# EAGLE board RoboArm Board (EAGLE 9.6.2)
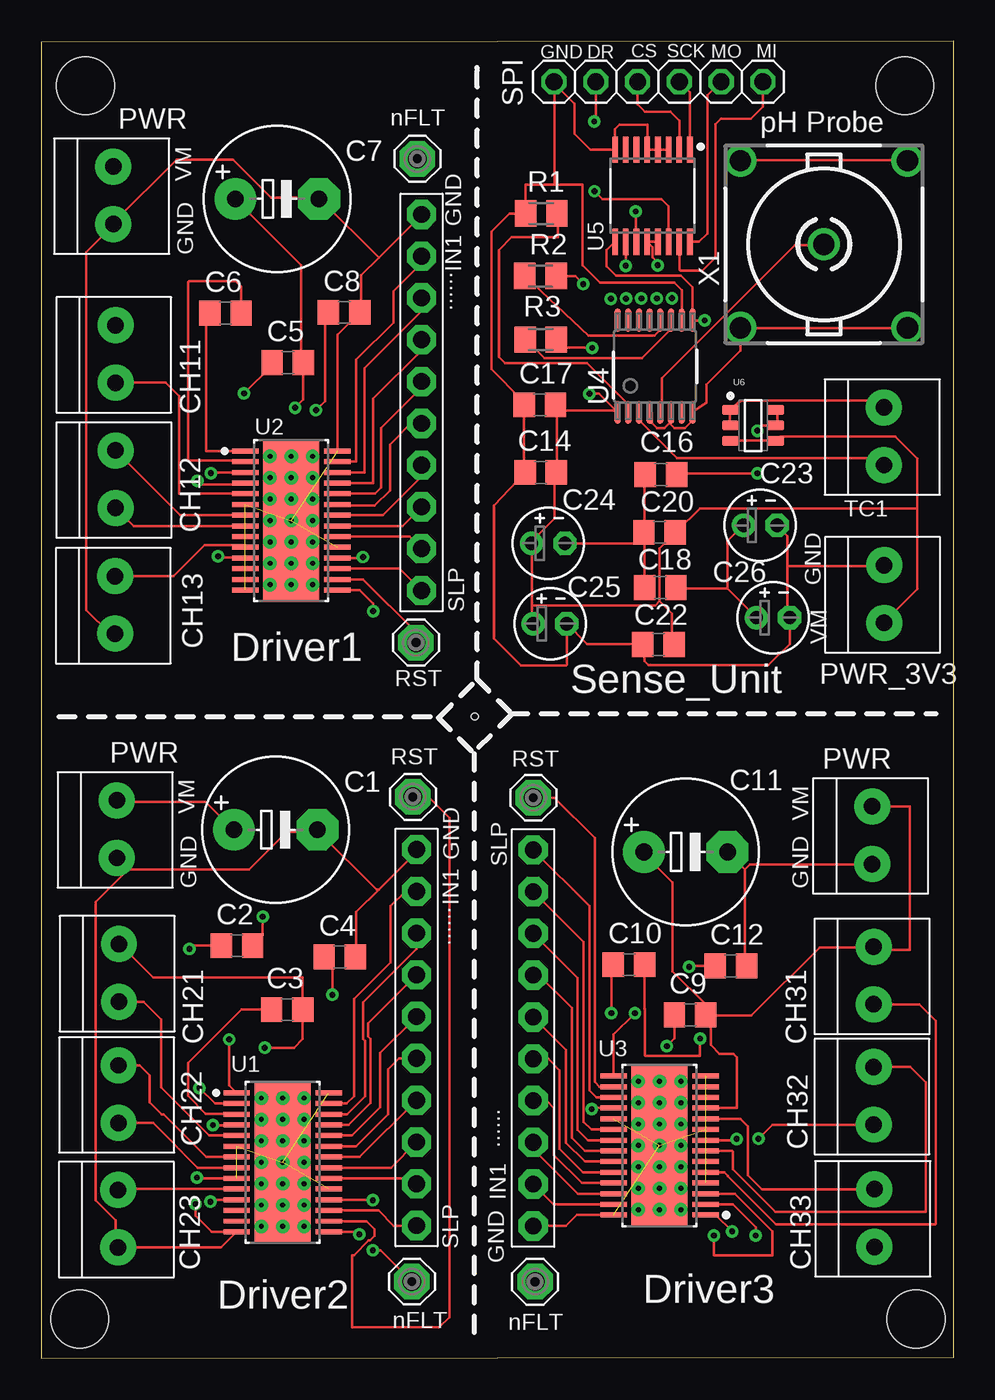
[diagram p0: board, top side]
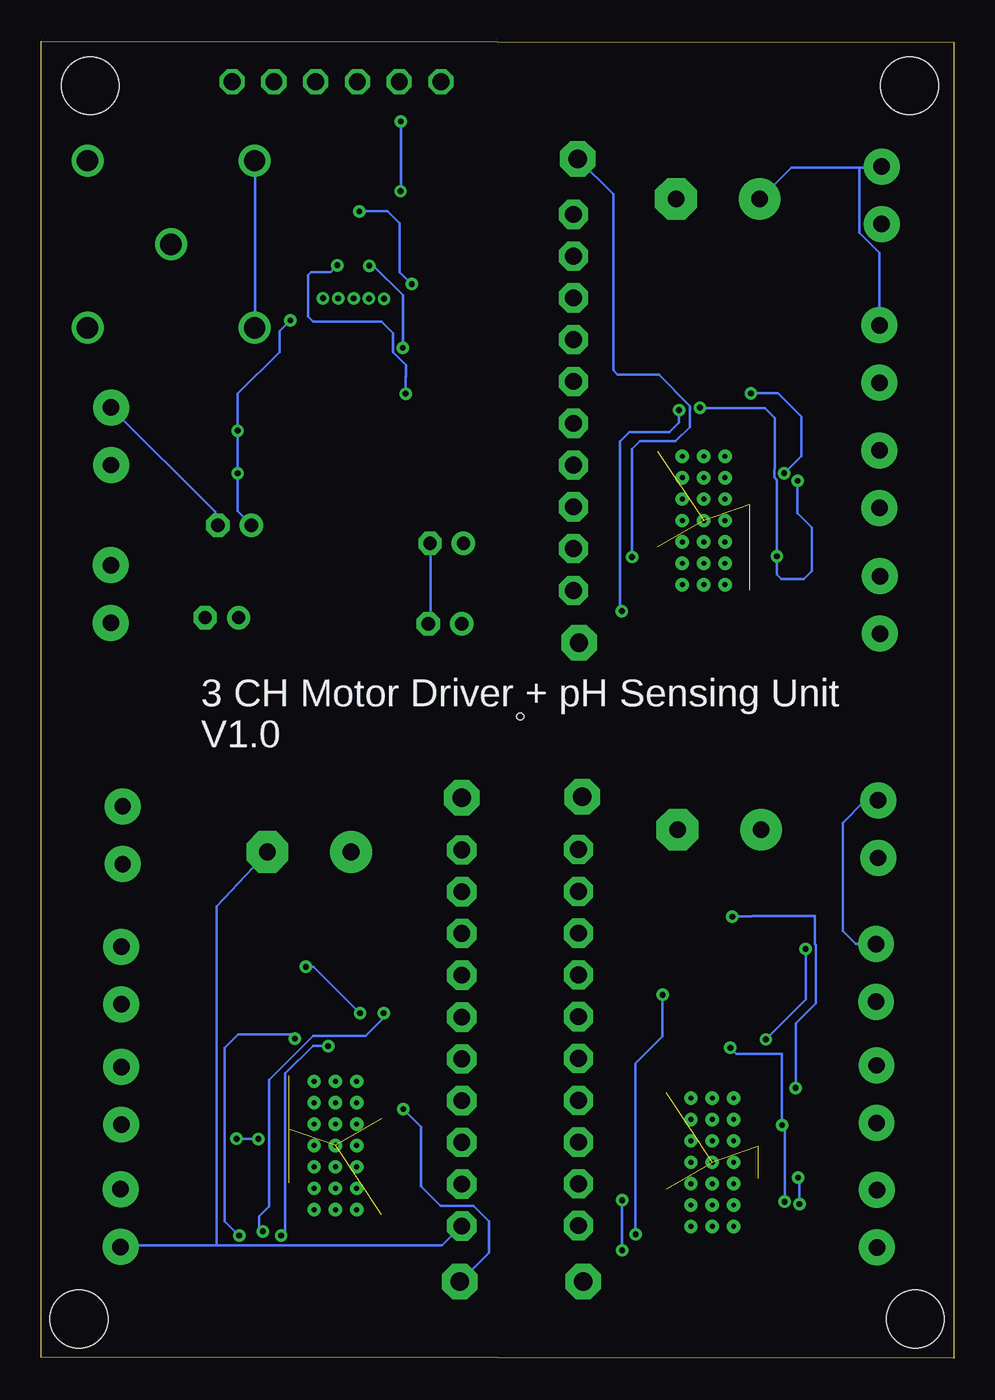
[diagram p1: board, bottom side, seen from below]

Size 55.49 x 80.07 mm. Coordinates in mm from the lower left corner, seen from the top.
Outline: 0,0 55.49,0.07 55.49,80.07 0,80 0,0
Copper layers (1*16): Top 0.035mm / dielectric 1.5mm / Bottom 0.035mm
Design rules "default": minimum track width 6mil, minimum drill 0.35mm, track to track 6mil, track to pad 6mil, pad to pad 6mil, via to via 6mil, smd to smd 6mil, copper to edge 40mil, drill to drill 6mil, minimum pad ring 10mil, minimum via ring 8mil, stop-mask expansion 4mil, vias tented up to drill 0mil, thermal gap 10mil
Holes 3.5 mm at 52.51,77.36 2.69,77.36 53.19,2.39 2.35,2.39
Holes 0.4 mm at 26.36,39.01

## Footprints (pad centres in the part's own frame; a part is rotated, then mirrored left to right if it is on the bottom)
E5-8,5 = drill 1.016 pad 2.54: + -2.54,0 | drill 1.016 pad 2.54 octagon: - 2.54,0
C0805 = smd 1.3 x 1.5: 1 -0.95,0; 2 0.95,0
E2-4 = drill 0.813 pad 1.422: + -1.016,0 | drill 0.813 pad 1.422 octagon: - 1.016,0
1X2-3.5MM = drill 1 pad 2.184: 1 1.8,0; 2 -1.7,0
1X06 = drill 1.016 octagon: 1 -6.35,0; 2 -3.81,0; 3 -1.27,0; 4 1.27,0; 5 3.81,0; 6 6.35,0
SE11 = drill 1.118 pad 2.159 octagon: MP 0,0
M0805 = smd 1.3 x 1.6: 1 -0.95,0; 2 0.95,0
TEXAS_INSTRUMENTS_DRV8844PWP_0 = smd 1.6 x 0.3: 1 -2.8,4.225; 2 -2.8,3.575; 3 -2.8,2.925; 4 -2.8,2.275; 5 -2.8,1.625; 6 -2.8,0.975; 7 -2.8,0.325; 8 -2.8,-0.325; 9 -2.8,-0.975; 10 -2.8,-1.625; 11 -2.8,-2.275; 12 -2.8,-2.925; 13 -2.8,-3.575; 14 -2.8,-4.225; 15 2.8,-4.225; 16 2.8,-3.575; 17 2.8,-2.925; 18 2.8,-2.275; 19 2.8,-1.625; 20 2.8,-0.975; 21 2.8,-0.325; 22 2.8,0.325; 23 2.8,0.975; 24 2.8,1.625; 25 2.8,2.275; 26 2.8,2.925; 27 2.8,3.575; 28 2.8,4.225 | drill 0.3 pad 0.6: PAD_1 -1.3,3.9; PAD_2 -1.3,2.6; PAD_3 -1.3,1.3; PAD_4 -1.3,0; PAD_5 -1.3,-1.3; PAD_6 -1.3,-2.6; PAD_7 -1.3,-3.9; PAD_8 0,3.9; PAD_9 0,2.6; PAD_10 0,1.3; PAD_11 0,0; PAD_12 0,-1.3; PAD_13 0,-2.6; PAD_14 0,-3.9; PAD_15 1.3,3.9; PAD_16 1.3,2.6; PAD_17 1.3,1.3; PAD_18 1.3,0; PAD_19 1.3,-1.3; PAD_20 1.3,-2.6; PAD_21 1.3,-3.9 | smd 3.4 x 9.7: PPAD 0,0 | smd 3.1 x 5.18: SMD_2 0,0 | smd 1.55 x 0.25: SMD_31 -2.8,4.225; SMD_32 -2.8,3.575; SMD_33 -2.8,2.925; SMD_34 -2.8,2.275; SMD_35 -2.8,1.625; SMD_36 -2.8,0.975; SMD_37 -2.8,0.325; SMD_38 -2.8,-0.325; SMD_39 -2.8,-0.975; SMD_40 -2.8,-1.625; SMD_41 -2.8,-2.275; SMD_42 -2.8,-2.925; SMD_43 -2.8,-3.575; SMD_44 -2.8,-4.225; SMD_45 2.8,-4.225; SMD_46 2.8,-3.575; SMD_47 2.8,-2.925; SMD_48 2.8,-2.275; SMD_49 2.8,-1.625; SMD_50 2.8,-0.975; SMD_51 2.8,-0.325; SMD_52 2.8,0.325; SMD_53 2.8,0.975; SMD_54 2.8,1.625; SMD_55 2.8,2.275; SMD_56 2.8,2.925; SMD_57 2.8,3.575; SMD_58 2.8,4.225
PW0016A_L = smd 1.4 x 0.35: 1 -2.8,2.275; 2 -2.8,1.625; 3 -2.8,0.975; 4 -2.8,0.325; 5 -2.8,-0.325; 6 -2.8,-0.975; 7 -2.8,-1.625; 8 -2.8,-2.275; 9 2.8,-2.275; 10 2.8,-1.625; 11 2.8,-0.975; 12 2.8,-0.325; 13 2.8,0.325; 14 2.8,0.975; 15 2.8,1.625; 16 2.8,2.275
TEXAS_INSTRUMENTS_ADS1120IPWR_0 = smd 0.35 x 1.6: 1 -2.275,-2.8; 2 -1.625,-2.8; 3 -0.975,-2.8; 4 -0.325,-2.8; 5 0.325,-2.8; 6 0.975,-2.8; 7 1.625,-2.8; 8 2.275,-2.8; 9 2.275,2.8; 10 1.625,2.8; 11 0.975,2.8; 12 0.325,2.8; 13 -0.325,2.8; 14 -0.975,2.8; 15 -1.625,2.8; 16 -2.275,2.8 | smd 0.3 x 1.55: SMD_17 -2.275,-2.8; SMD_18 -1.625,-2.8; SMD_19 -0.975,-2.8; SMD_20 -0.325,-2.8; SMD_21 0.325,-2.8; SMD_22 0.975,-2.8; SMD_23 1.625,-2.8; SMD_24 2.275,-2.8; SMD_25 2.275,2.8; SMD_26 1.625,2.8; SMD_27 0.975,2.8; SMD_28 0.325,2.8; SMD_29 -0.325,2.8; SMD_30 -0.975,2.8; SMD_31 -1.625,2.8; SMD_32 -2.275,2.8
TEXAS_INSTRUMENTS_REF3220AIDBVR_1 = smd 1 x 0.6: 1 -1.375,0.95; 2 -1.375,0; 3 -1.375,-0.95; 4 1.375,-0.95; 5 1.375,0; 6 1.375,0.95
1X10-BIG = drill 1.016 pad 1.778 octagon: 1 -11.43,0; 2 -8.89,0; 3 -6.35,0; 4 -3.81,0; 5 -1.27,0; 6 1.27,0; 7 3.81,0; 8 6.35,0; 9 8.89,0; 10 11.43,0
R141426 = drill 1.295: 1 0,0; 2 5.08,5.08; 3 -5.08,5.08; 4 -5.08,-5.08; 5 5.08,-5.08

## Placement (x,y rotation side)
C1  100uF  [E5-8,5]  14.26,32.13 0 top
C2  0.01uF  [C0805]  11.91,25.09 0 top
C3  0.1uF  [C0805]  14.96,21.2 0 top
C4  0.47uF  [C0805]  18.15,24.4 0 top
C5  0.1uF  [C0805]  14.99,60.53 0 top
C6  0.01uF  [C0805]  11.21,63.53 0 top
C7  100uF  [E5-8,5]  14.35,70.48 0 top
C8  0.47uF  [C0805]  18.42,63.58 0 top
C9  0.1uF  [C0805]  39.45,20.88 0 top
C10  0.01uF  [C0805]  35.74,23.94 0 top
C11  100uF  [E5-8,5]  39.19,30.78 0 top
C12  0.47uF  [C0805]  41.93,23.86 0 top
C14  0.1uF  [C0805]  30.37,53.85 0 top
C16  0.1uF  [C0805]  37.68,53.72 0 top
C17  0.47uF  [C0805]  30.32,57.96 0 top
C18  0.1uF  [C0805]  37.64,46.86 0 top
C20  0.1uF  [C0805]  37.6,50.22 0 top
C22  0.1uF  [C0805]  37.53,43.39 0 top
C23  10uF  [E2-4]  43.72,50.63 0 top
C24  10uF  [E2-4]  30.83,49.55 0 top
C25  10uF  [E2-4]  30.94,44.66 0 top
C26  10uF  [E2-4]  44.5,45.03 0 top
J1  1X2-3.5MM  [1X2-3.5MM]  4.6,32.22 270 top
J2  1X2-3.5MM  [1X2-3.5MM]  4.73,23.48 270 top
J3  1X2-3.5MM  [1X2-3.5MM]  4.7,16.11 270 top
J4  1X2-3.5MM  [1X2-3.5MM]  4.68,8.54 270 top
J5  1X2-3.5MM  [1X2-3.5MM]  4.39,70.75 270 top
J6  1X2-3.5MM  [1X2-3.5MM]  4.52,61.1 270 top
J7  1X2-3.5MM  [1X2-3.5MM]  4.53,53.49 270 top
J8  1X2-3.5MM  [1X2-3.5MM]  4.49,45.85 270 top
J9  1X2-3.5MM  [1X2-3.5MM]  50.53,31.85 270 top
J10  1X2-3.5MM  [1X2-3.5MM]  50.62,23.32 270 top
J11  1X2-3.5MM  [1X2-3.5MM]  50.61,16.01 270 top
J12  1X2-3.5MM  [1X2-3.5MM]  50.66,8.58 270 top
J13  1X2-3.5MM  [1X2-3.5MM]  51.24,56.1 270 top
J15  1X2-3.5MM  [1X2-3.5MM]  51.25,46.51 270 top
JP1  [1X06]  37.53,77.6 180 top
LSP1  SE11  [SE11]  22.6,34.13 0 top
LSP2  SE11  [SE11]  22.54,4.67 0 top
LSP3  SE11  [SE11]  22.79,43.51 0 top
LSP4  SE11  [SE11]  22.87,72.92 0 top
LSP5  SE11  [SE11]  29.92,34.08 0 top
LSP6  SE11  [SE11]  30.03,4.66 0 top
R1  100  [M0805]  30.41,69.59 0 top
R2  1K  [M0805]  30.36,65.79 0 top
R3  1K  [M0805]  30.37,61.93 0 top
U1  TEXAS_INSTRUMENTS_DRV8844PWPTEXAS_INSTRUMENTS_DRV8844PWP_0_0  [TEXAS_INSTRUMENTS_DRV8844PWP_0]  14.69,11.92 0 top
U2  TEXAS_INSTRUMENTS_DRV8844PWPTEXAS_INSTRUMENTS_DRV8844PWP_0_0  [TEXAS_INSTRUMENTS_DRV8844PWP_0]  15.21,50.93 0 top
U3  TEXAS_INSTRUMENTS_DRV8844PWPTEXAS_INSTRUMENTS_DRV8844PWP_0_0  [TEXAS_INSTRUMENTS_DRV8844PWP_0]  37.6,12.94 180 top
U4  Value  [PW0016A_L]  37.32,60.31 90 top
U5  TEXAS_INSTRUMENTS_ADS1120IPWRTEXAS_INSTRUMENTS_ADS1120IPWR_0_0  [TEXAS_INSTRUMENTS_ADS1120IPWR_0]  37.17,70.67 180 top
U6  TEXAS_INSTRUMENTS_REF3220AIDBVRTEXAS_INSTRUMENTS_REF3220AIDBVR_0_1  [TEXAS_INSTRUMENTS_REF3220AIDBVR_1]  43.28,56.71 0 top
U$1  PINHD-1X10  [1X10-BIG]  22.82,19.5 270 top
U$2  PINHD-1X10  [1X10-BIG]  23.13,58.11 270 top
U$3  PINHD-1X10  [1X10-BIG]  29.91,19.48 90 top
X1  R141426  [R141426]  47.59,67.72 90 top

## Library data of the parts
C1 C7 C11 C23-C26 J1-J13 J15 JP1 U$1-U$3 = adafruit
C2-C6 C8-C10 C12 C14 C16-C18 C20 C22 = rcl; SPICEPREFIX: C
LSP1-LSP6 = solpad
R1-R3 = rcl; SPICEPREFIX: R
U1-U3 = Texas Instruments - DRV8844PWP; AMBIENT_TEMPERATURE_RANGE_HIGH: +125°C; AMBIENT_TEMPERATURE_RANGE_LOW: -40°C; CENTROID_NOT_SPECIFIED: No; DATASHEET: http://www.ti.com/lit/ds/symlink/drv8844.pdf; DEVICE_CLASS_L1: Integrated Circuits (ICs); DEVICE_CLASS_L2: Power Management ICs; DEVICE_CLASS_L3: Motor Drivers; DIGIKEY_DESCRIPTION: IC MOTOR DRIVER PAR 28HTSSOP; DIGIKEY_PART_NUMBER: 296-46510-5-ND; HEIGHT: 1.2mm; LEAD_FREE: yes; MAX_JUNCTION_TEMP: +150°C; MAX_SUPPLY_VOLTAGE: 60V; MF: Texas Instruments; MFG_PACKAGE_IDENT: PWP0028C; MFG_PACKAGE_IDENT_DATE: 0; MFG_PACKAGE_IDENT_REV: 0; MIN_SUPPLY_VOLTAGE: 8V; MOTOR_TYPE: Stepper; MOUSER_DESCRIPTION: Motor / Motion / Ignition Controllers & Drivers Brushed DC motor Solenoid/Relay Drvr; MOUSER_PART_NUMBER: 595-DRV8844PWP; MPN: DRV8844PWP; NOMINAL_SUPPLY_CURRENT: 1mA; NUMBER_OF_OUTPUTS: 4; PACKAGE: HTSSOP28; PREFIX: U; ROHS: yes; STANDOFF_HEIGHT: 0.05mm; TEMPERATURE_RANGE_HIGH: +85°C; TEMPERATURE_RANGE_LOW: -40°C; VERIFICATION_VERSION: 0.0.0.1
U4 = LMP91200; ALTERNATE_PARTNUMBER: LMP91200MT/NOPB; COMPTYPE: IC; MANUFACTURER: Texas Instruments; MOUNTTYPE: SMT; PACKAGEREFERENCE: PW0016A; PARTNUMBER: LMP91200MTX/NOPB; PIN_COUNT: 16; REFDES: RefDes; ROHS: Y; TYPE: TYPE
U5 = Texas Instruments - ADS1120IPWR; CENTROID_NOT_SPECIFIED: No; DATASHEET: http://www.ti.com/lit/ds/symlink/ads1120.pdf; DIGIKEY_DESCRIPTION: IC ADC CONV 16BIT LP LN 16TSSOP; DIGIKEY_PART_NUMBER: 296-37280-1-ND; LEAD_FREE: yes; MF: Texas Instruments; MFG_PACKAGE_IDENT: PW (R-PDSO-G16); MFG_PACKAGE_IDENT_DATE: 02/11; MFG_PACKAGE_IDENT_REV: G; MOUSER_PART_NUMBER: 595-ADS1120IPWR; MPN: ADS1120IPWR; PACKAGE: TSSOP16; PREFIX: U; ROHS: yes; TEMPERATURE_RANGE_HIGH: +125°C; TEMPERATURE_RANGE_LOW: -40°C
U6 = Texas Instruments - REF3220AIDBVR; CIIVA_IDS: 2916718; CODE__JEDEC: MO-178; COMPONENT_LINK_1_DESCRIPTION: Manufacturer URL; COMPONENT_LINK_1_URL: http://www.ti.com/; COMPONENT_LINK_3_DESCRIPTION: Package Specification; COMPONENT_LINK_3_URL: http://www.ti.com/litv/pdf/mpds026h; DATASHEET: http://www.ti.com/general/docs/lit/getliterature.tsp?genericPartNumber=REF3220&fileType=pdf; DATASHEET_VERSION: SBVS058C; FOOTPRINT_VARIANT_NAME_0: Level C; FOOTPRINT_VARIANT_NAME_1: Level B; FOOTPRINT_VARIANT_NAME_2: Level A; IMPORTED: yes; IMPORTED_FROM: vault; IMPORT_TS: 1521865782; INITIAL_ACCURACY__25DEG_C: 0.2; IOUT_IZ_MAXM_A: 10; IQ_MAXU_A: 120; MF: Texas Instruments; MOUNTING_TECHNOLOGY: Surface Mount; MPN: REF3220AIDBVR; PACKAGE: DBV0006A; PACKAGE_DESCRIPTION: 6-Pin Plastic Small Outline, Body 1.60 Ã— 2.90 mm, Pitch 0.95 mm; PACKAGE_VERSION: 4073253-5/K; PREFIX: U; RATING: Catalog; RELEASE_DATE: 1464594691; ROHS: Yes; SUB_FAMILY: Series Voltage Reference; TEMP_COEFFMAXPPM_DEGREE_C: 7; TEMP_COEFFTYPPPM_DEGREE_C: 4; VAULT_GUID: 2EDC43C8-66F4-4E8E-B796-F9B110D5B6D3; VAULT_REVISION: 8C93BD7F-AEC2-45C7-B35F-C6839A5AF6A7; VI_MAX_V: 5.5; VI_MIN_V: 2.098; VO_V: 2.048
X1 = con-coax; MF: FARNELL; MPN: R141426161; OC_FARNELL: 4195115; OC_NEWARK: 14J7919

## Nets
N$1: J2.1 U1.5
N$2: J3.2 U1.7
N$3: J3.1 U1.8
N$4: J4.2 U1.10
N$5: LSP2.MP U1.18
N$6: J6.1 U2.5
N$7: C2.2 U1.2
N$8: C2.1 U1.1
N$9: C1.+ C3.2 J1.2 J2.2 U1.4 U1.11
N$10: C3.1 U1.3
N$11: C4.1 U1.15
N$12: C1.- C4.2 J1.1 J4.1 U1.6 U1.9 U1.14 U1.19 U1.28 U1.PPAD U$1.1
N$13: J7.2 U2.7
N$14: U1.27 U$1.2
N$15: U1.25 U$1.4
N$16: U1.26 U$1.3
N$17: U1.24 U$1.5
N$18: U1.23 U$1.6
N$19: U1.22 U$1.7
N$20: U1.21 U$1.8
N$21: U1.20 U$1.9
N$22: U1.17 U$1.10
N$23: LSP1.MP U1.16
N$24: J7.1 U2.8
N$25: J8.2 U2.10
N$26: C6.2 U2.2
N$27: C6.1 U2.1
N$28: C5.2 C7.+ J5.2 J6.2 U2.4 U2.11
N$29: C5.1 U2.3
N$30: U2.27 U$2.2
N$31: U2.25 U$2.4
N$32: U2.26 U$2.3
N$33: U2.24 U$2.5
N$34: U2.23 U$2.6
N$35: U2.22 U$2.7
N$36: U2.21 U$2.8
N$37: U2.20 U$2.9
N$38: U2.17 U$2.10
N$39: LSP3.MP U2.16
N$40: C8.1 U2.15
N$41: LSP4.MP U2.18
N$42: C7.- C8.2 J5.1 J8.1 U2.6 U2.9 U2.14 U2.19 U2.28 U2.PPAD U$2.1
N$43: J10.1 U3.5
N$44: J11.2 U3.7
N$45: J11.1 U3.8
N$46: J12.2 U3.10
N$47: C10.2 U3.2
N$48: C10.1 U3.1
N$49: C9.2 C11.+ J9.2 J10.2 U3.4 U3.11
N$50: C9.1 U3.3
N$51: U3.27 U$3.2
N$52: U3.25 U$3.4
N$53: U3.26 U$3.3
N$54: U3.24 U$3.5
N$55: U3.23 U$3.6
N$56: U3.22 U$3.7
N$57: U3.21 U$3.8
N$58: U3.20 U$3.9
N$59: U3.17 U$3.10
N$60: LSP5.MP U3.16
N$61: C12.1 U3.15
N$62: LSP6.MP U3.18
N$63: C11.- C12.2 J9.1 J12.1 U3.6 U3.9 U3.14 U3.19 U3.28 U3.PPAD U$3.1
N$65: U4.5 X1.1
N$66: R2.1 U4.12
N$67: U4.4 U4.6 U4.8 X1.2 X1.3 X1.4 X1.5
N$68: R1.2 U4.2
N$69: J13.1 U4.3
N$70: R3.1 U4.11
N$71: R2.2 U5.11
N$74: R3.2 U5.10
N$75: C14.1 C16.1 C17.1 C18.1 C20.1 C22.1 C23.- C24.- C25.- C26.- J13.2 J15.2 JP1.6 R1.1 U4.10 U5.3 U5.4 U5.5 U5.8 U6.1 U6.2
N$76: JP1.1 U5.15
N$77: C14.2 C17.2 C20.2 C22.2 C24.+ C25.+ J15.1 U4.1 U5.12 U5.13 U6.3 U6.4
N$78: JP1.2 U5.16
N$79: JP1.3 U5.1
N$80: JP1.4 U5.2
N$81: JP1.5 U5.14
N$82: C16.2 C18.2 C23.+ C26.+ U4.9 U5.9 U6.5 U6.6

## Tracks (layer width: path | path; a pad name or v marks a point on that pad's centre or on a via)
N$1
  Top 0.152: U1.5 10.22,13.54 7.3,16.47 7.3,20.61 6.23,21.68 J2.1
N$2
  Top 0.152: U1.7 10.04,12.24 7.46,14.82 7.33,14.82 6.6,15.55 6.6,17.2 5.99,17.81 J3.2
N$3
  Top 0.152: U1.8 9.52,11.6 6.8,14.31 J3.1
N$4
  Top 0.152: U1.10 4.74,10.29 J4.2
N$5  (via drill 0.35)
  Top 0.152: LSP2.MP 20.64,6.57 v20.17,6.57 | U1.18 20.14,9.64 v20.17,9.61
  Bottom 0.152: v20.17,6.57 v20.17,9.61
N$6
  Top 0.152: J6.1 7.58,59.3 8.38,58.5 8.38,52.55 U2.5
N$7  (via drill 0.35)
  Top 0.152: U1.2 10.56,15.49 v9.62,16.44 | C2.2 13.47,25.7 v13.47,26.85
  Bottom 0.152: v9.62,16.44 9.62,20.36 8.4,21.58 8.4,25.14 8.44,25.18 8.44,26.89 12.26,26.89 12.3,26.85 v13.47,26.85
N$8  (via drill 0.35)
  Top 0.152: U1.1 11.43,16.61 v11.43,19.39 | v9.01,24.89 9.21,25.09 C2.1
  Bottom 0.152: v11.43,19.39 9.01,21.81 v9.01,24.89
N$9  (via drill 0.35)
  Top 0.152: J1.2 4.68,33.83 10.02,33.83 11.69,32.16 C1.+ | J2.2 4.83,25.15 6.82,23.16 15.89,23.16 15.91,23.13 C3.2 15.91,19.41 15.38,18.88 v13.59,18.88 | U1.4 11.87,14.18 v10.45,14.18 | U1.11 10.41,9.64 v10.29,9.52
  Bottom 0.152: J1.2 5.4,33.92 6.76,32.56 6.76,25.99 5.96,25.18 J2.2 | v13.59,18.88 13.23,18.52 10.46,18.52 10.45,18.51 v10.45,14.18 10.29,14.02 v10.29,9.52
N$10
  Top 0.152: C3.1 12.18,21.2 8.94,17.96 8.94,15.95 10.02,14.88 11.24,14.88 11.27,14.85 U1.3
N$11  (via drill 0.35)
  Top 0.152: U1.15 19.2,7.7 v19.35,7.54 | v17.71,22.1 17.71,23.89 C4.1
  Bottom 0.152: v19.35,7.54 19.35,17.92 17.71,19.56 v17.71,22.1
N$12  (via drill 0.35)  (4 unrouted)
  Top 0.152: 20.53,28.5 22.82,30.79 U$1.1 | 20.53,28.5 19.16,27.13 19.16,24.54 C4.2 | 20.53,28.5 20.38,28.5 16.87,32 C1.- 16.72,32 14.93,32 12.65,29.73 5.29,29.73 J1.1 | 4.53,30.33 J1.1 | J1.1 5.29,29.72 3.31,27.74 3.31,9.6 4.53,8.38 4.53,6.86 J4.1 10.94,6.74 U1.14 10.36,7.7 9.39,8.66 v9.39,9.38 | U1.9 9.51,10.95 v9.47,10.99
  Bottom 0.152: v9.39,9.38 9.39,10.91 v9.47,10.99
N$13
  Top 0.152: U2.7 8.46,51.26 J7.2
N$14
  Top 0.152: U1.27 18.57,15.49 19.02,15.94 19.02,21.86 21.24,24.08 21.24,27.49 22.14,28.39 U$1.2
N$15
  Top 0.152: U1.25 18.68,14.2 20.02,15.53 20.02,19.42 19.88,19.56 19.88,20.37 U$1.4
N$16
  Top 0.152: U1.26 18.61,14.85 19.7,15.94 19.7,19.31 19.57,19.43 19.57,21.65 22.82,24.89 U$1.3
N$17
  Top 0.152: U1.24 18.89,13.54 20.61,15.26 20.61,18.56 U$1.5
N$18
  Top 0.152: U1.23 19.14,12.89 21.09,14.84 21.09,17.56 21.76,18.23 U$1.6
N$19
  Top 0.152: U1.22 19.38,12.24 U$1.7
N$20
  Top 0.152: U1.21 21.27,11.6 U$1.8
N$21
  Top 0.152: U1.20 22.48,10.95 U$1.9
N$22
  Top 0.152: U1.17 20.5,8.99 21.43,8.07 U$1.10
N$23
  Top 0.152: U1.16 19.79,8.35 20.28,7.85 20.28,7.46 20,7.18 19.92,7.18 19.02,6.28 18.89,6.28 18.89,1.9 18.9,1.89 24.2,1.89 24.82,2.51 24.82,32.85 23.54,34.13 LSP1.MP
N$24
  Top 0.152: U2.8 5.62,50.6 J7.1
N$25
  Top 0.152: U2.10 12.28,49.44 9.96,49.44 8.07,47.55 J8.2
N$26
  Top 0.152: U2.2 12.35,54.56 8.93,54.56 8.93,65.42 8.99,65.49 11.83,65.49 | 11.83,65.49 11.88,65.49 | C6.2 12.16,65.16 11.83,65.49
N$27
  Top 0.152: U2.1 10.03,55.16 10.03,63.3 C6.1
N$28  (via drill 0.35)
  Top 0.152: C7.+ 11.84,70.41 15.81,66.45 15.81,60.66 C5.2 15.94,58.29 v15.44,57.79 | U2.11 12.39,48.67 10.85,48.67 v10.76,48.76 | U2.4 12.31,53.1 9.74,53.1 v9.51,53.34
  Bottom 0.152: 5.75,72.38 9.87,72.38 11.69,70.56 C7.+ | J5.2 4.53,72.39 5.75,72.39 5.75,72.38 | 5.75,72.38 5.75,68.43 4.53,67.21 4.53,62.94 J6.2 | v9.51,53.34 9.51,51.38 8.62,50.49 8.62,47.85 9.11,47.36 10.48,47.36 10.76,47.64 v10.76,48.76 | v10.76,48.76 10.7,48.82 | v10.76,48.76 10.76,53.39 10.93,53.56 10.93,54.06 10.88,54.11 10.88,57.16 11.48,57.76 15.44,57.76 v15.44,57.79
N$29  (via drill 0.35)
  Top 0.152: U2.3 10.37,53.85 v10.32,53.81 | v12.34,58.66 14.04,60.36 C5.1
  Bottom 0.152: v10.32,53.81 9.27,54.86 9.27,57.24 10.69,58.66 v12.34,58.66
N$30
  Top 0.152: U2.27 19.16,54.51 19.16,60.71 21.42,62.97 21.42,64.86 23.13,66.57 U$2.2
N$31
  Top 0.152: U2.25 20.19,53.2 20.19,58.33 23.13,61.27 U$2.4
N$32
  Top 0.152: U2.26 19.66,53.85 19.66,60.19 23.13,63.66 U$2.3
N$33
  Top 0.152: U2.24 20.29,52.55 20.67,52.94 20.67,56.56 23.13,59.02 U$2.5
N$34
  Top 0.152: U2.23 18.08,51.84 20.27,51.84 21.2,52.77 21.2,55.55 22.49,56.84 U$2.6
N$35
  Top 0.152: U$2.7 23.13,53.59 20.8,51.26 U2.22
N$36
  Top 0.152: U$2.8 21.98,50.6 U2.21
N$37
  Top 0.152: U$2.9 22.39,49.95 U2.20
N$38
  Top 0.152: U$2.10 21.8,48.01 U2.17
N$39
  Top 0.152: U2.16 19.59,47.35 22.79,44.15 LSP3.MP
N$40  (via drill 0.35)
  Top 0.152: C8.1 17.26,63.37 17.26,58.19 v16.71,57.64 | v20.18,45.42 20.18,45.89 19.37,46.7 U2.15
  Bottom 0.152: v16.71,57.64 16.71,56.88 17.28,56.31 19.72,56.31 20.3,55.73 20.3,45.42 v20.18,45.42
N$41  (via drill 0.35)
  Top 0.152: v19.57,48.71 19.52,48.66 U2.18
  Bottom 0.152: v19.57,48.71 19.57,55.27 19.09,55.75 16.92,55.75 16.05,56.62 16.05,57.07 16.05,57.9 17.94,59.79 20.44,59.79 20.71,60.06 20.71,70.76 LSP4.MP
N$42  (5 unrouted)
  Top 0.152: 20.53,66.9 23.12,69.49 U$2.1 | 20.53,66.9 19.46,65.84 19.46,63.7 C8.2 18.01,62.22 U2.28 | 20.53,66.9 17.03,70.41 C7.- 16.87,70.56 13.98,70.56 11.66,72.88 8.24,72.88 4.39,69.02 J5.1 4.38,68.89 2.74,67.25 2.74,45.5 4.19,44.05 J8.1
N$43
  Top 0.152: U3.5 41.52,11.31 41.76,11.09 41.76,11.07 44.68,8.15 54.36,8.15 54.4,8.19 54.4,20.51 53.39,21.52 J10.1
N$44
  Top 0.152: J11.2 52.85,17.71 53.77,16.79 53.77,8.9 44.64,8.9 42.06,11.48 42.06,12.26 42.06,12.37 42.06,12.56 42.01,12.62 U3.7
N$45  (via drill 0.35)
  Top 0.152: J11.1 44.47,14.21 v43.61,13.35 | U3.8 42.2,13.27 v42.28,13.34
  Bottom 0.152: v43.61,13.35 v42.29,13.35 v42.28,13.34
N$46
  Top 0.152: J12.2 43.81,10.28 42.97,11.12 42.97,14.11 42.52,14.56 U3.10
N$47  (via drill 0.35)
  Top 0.152: C10.2 36.69,21.25 36.71,21.23 36.71,18.42 36.75,18.38 40.04,18.38 40.06,18.4 v40.06,19.44 | U3.2 42.05,9.37 43.45,7.96 v43.45,7.46
  Bottom 0.152: v43.45,7.46 44.32,8.34 44.32,18.86 43.5,19.68 40.3,19.68 v40.06,19.44
N$48  (via drill 0.35)
  Top 0.152: v42.01,7.72 v42.01,7.71 41.01,8.71 U3.1 | v34.67,20.98 34.67,23.82 C10.1
  Bottom 0.152: v42.01,7.72 42.23,7.94 42.23,8.63 41.62,9.24 41.62,16.94 38.95,19.61 35.77,19.61 34.56,20.82 34.56,20.87 v34.67,20.98
N$49  (1 unrouted)
  Top 0.152: J9.2 52.82,33.55 52.82,24.84 50.8,24.84 J10.2 50.55,24.99 47.33,24.99 43.18,20.85 40.43,20.85 C9.2 | C9.2 40.34,21.03 40.34,21.57 38.38,23.53 38.38,28.92 36.65,30.65 C11.+ | C9.2 40.72,20.56 40.72,19.05 41.25,18.52 42.08,18.52 42.3,18.3 42.3,15.21 U3.11
N$50  (via drill 0.35)
  Top 0.152: C9.1 38.5,19.45 v38.04,18.99 | v40.9,7.47 40.9,6.28 44.46,6.28 44.46,7.72 42.16,10.02 U3.3
  Bottom 0.152: v38.04,18.99 38.05,19 38.97,19 40.66,17.31 40.66,7.71 v40.9,7.47
N$51
  Top 0.152: U3.27 31.14,9.37 U$3.2
N$52
  Top 0.152: U3.25 32.87,10.66 31.19,12.34 31.19,15.19 30.71,15.67 U$3.4
N$53
  Top 0.152: U3.26 32.65,10.02 29.91,12.75 U$3.3
N$54
  Top 0.152: U3.24 32.95,11.31 31.52,12.75 31.52,17.52 30.83,18.21 U$3.5
N$55
  Top 0.152: U3.23 33.06,11.96 31.92,13.11 31.92,18.74 U$3.6
N$56
  Top 0.152: U3.22 33.05,12.62 32.26,13.41 32.26,21.31 30.28,23.29 U$3.7
N$57
  Top 0.152: U3.21 33.23,13.27 32.62,13.88 32.62,23.12 U$3.8
N$58
  Top 0.152: U3.20 33.45,13.91 32.97,14.39 32.97,25.31 U$3.9
N$59
  Top 0.152: U3.17 33.76,15.87 33.33,16.29 33.33,27.49 U$3.10
N$60
  Top 0.152: U3.16 33.95,16.52 33.66,16.81 33.66,31.62 31.2,34.08 LSP5.MP
N$61  (via drill 0.35)
  Top 0.152: U3.15 34.8,19.68 v36.1,20.98 | v39.39,23.8 39.45,23.86 C12.1
  Bottom 0.152: v36.1,20.98 38.92,23.8 v39.39,23.8
N$62  (via drill 0.35)
  Top 0.152: U3.18 33.53,15.21 v33.47,15.15
  Bottom 0.152: v33.47,15.15 32.4,14.08 32.4,10.47 31.2,9.27 29.21,9.27 28.26,8.32 28.26,6.43 LSP6.MP
N$63  (5 unrouted)
  Top 0.152: 42.78,29.72 42.78,23.93 C12.2 | 42.78,29.72 41.87,30.63 C11.- | 42.78,29.72 43.09,30.02 50.4,30.02 J9.1 | U3.28 32.59,8.71 31.92,8.05 U$3.1
  Bottom 0.152: 44.81,6.86 31.1,6.86 U$3.1 | 44.81,6.86 50.55,6.86 J12.1 | 44.81,6.86 44.81,27.47 C11.-
N$65
  Top 0.152: U4.5 37.75,57.61 37.75,59.59 45.83,67.67 47.51,67.67 X1.1
N$66
  Top 0.152: U4.12 37.6,63.09 37.6,62.48 37.3,62.18 33.27,62.18 R2.1
N$67
  Top 0.152: X1.2 42.63,72.85 52.53,72.85 X1.5 | 38.21,56.84 37.91,56.54 37.45,56.54 37.14,56.84 37.14,57.45 U4.4 | 38.21,56.84 38.21,57.45 U4.6 38.21,56.84 | 38.21,56.84 38.51,56.54 39.12,56.54 39.58,57 39.58,57.45 U4.8 40.45,58.11 40.45,59.2 42.51,61.26 X1.3 42.63,62.64 52.53,62.64 X1.4
  Bottom 0.152: X1.2 42.48,72.69 42.48,62.79 X1.3
N$68
  Top 0.152: U4.2 35.62,57.61 35.62,58.06 33.18,60.5 28.2,60.5 27.83,60.87 27.83,67.36 28.61,68.14 31.41,68.14 31.41,69.54 R1.2 31.31,69.9
N$69
  Top 0.152: U4.3 36.38,57.45 36.38,57 38.67,54.71 50.86,54.71 51.16,54.41 J13.1
N$70
  Top 0.152: U4.11 38.21,63.09 38.21,62.48 36.53,60.81 30.59,60.81 29.52,61.87 R3.1
N$71  (via drill 0.35)
  Top 0.152: R2.2 32.47,65.79 v32.96,65.3 | U5.11 36.15,67.92 v36.15,69.72
  Bottom 0.152: v32.96,65.3 33.7,66.04 33.7,69 34.42,69.72 v36.15,69.72
N$72  (via drill 0.35)
  other vias: 34.64,64.41
N$73  (via drill 0.35)
  other vias: 35.56,64.42
N$74  (via drill 0.35)
  Top 0.152: R3.2 31.82,61.43 v33.5,61.43 | U5.10 v35.55,66.42 v35.54,66.42
  Bottom 0.152: v33.5,61.43 33.5,64.62 35.3,66.42 v35.54,66.42
N$75
  Top 0.152: 31.2,71.35 29.46,71.35 R1.1 28.49,69.59 27.37,68.47 27.37,60.12 29.22,58.27 29.22,58.06 C17.1 29.37,57.91 29.37,53.95 C14.1 27.52,51.83 27.52,43.76 29.17,42.11 31.9,42.11 31.96,42.17 C25.- 33.18,43.43 36.53,43.43 C22.1 36.69,43.28 36.69,42.38 36.93,42.14 44.22,42.14 45.52,43.43 C26.- 45.37,45.11 45.37,48.16 | 31.2,71.35 32.91,71.35 32.91,66.45 33.96,65.39 38.5,65.39 38.97,64.92 38.97,63.25 U4.10 | 31.2,71.35 31.2,77.49 | 31.2,77.49 31.2,77.57 JP1.6 | 36.69,49.53 36.69,50.14 C20.1 | 36.69,49.53 36.69,46.94 C18.1 | C16.1 36.69,53.65 36.69,50.29 C20.1 | 36.69,49.53 31.96,49.53 C24.- | 36.69,49.53 C20.1 | U6.2 41.87,56.84 41.87,57.61 U6.1 42.55,58.22 50.86,58.22 51.16,57.91 J13.2 | 45.37,48.16 45.37,49.99 44.76,50.6 C23.- | 45.37,48.16 51.16,48.16 J15.2 | 31.2,77.49 31.21,77.49 32.43,76.27 32.43,74.44 33.4,73.47 U5.8 34.9,74.7 35.16,74.97 36.84,74.97 U5.5 U5.4 U5.3
  Bottom 0.152: C24.- 31.81,49.53 31.81,44.81 C25.- | J13.2 51.16,57.76 51.16,57.71 44.92,51.47 C23.-
N$76
  Top 0.152: U5.15 38.8,66.19 38.87,66.12 40.2,66.12 40.98,66.9 40.98,75.01 41.32,75.35 43.15,75.35 43.88,76.08 JP1.1
N$77  (via drill 0.35)
  Top 0.152: U6.3 42.02,55.78 44.61,55.78 U6.4 44.94,56.05 51.92,56.05 53.26,54.7 53.26,51.66 | J15.1 51.32,44.81 53.28,46.77 53.28,51.66 53.26,51.66 | 31.66,57.61 35.01,57.61 U4.1 33.91,58.64 v33.33,58.64 | 31.66,57.61 31.35,57.91 C17.2 31.66,57.61 | 31.66,57.61 31.35,57.3 31.35,53.95 C14.2 31.2,53.8 31.2,51.05 29.83,49.68 C24.+ 29.83,49.53 29.83,45.77 | 37.6,46.02 38.36,45.26 38.36,43.43 C22.2 | 37.6,46.02 37.6,49.23 38.51,50.14 C20.2 38.67,50.29 40.04,51.66 53.26,51.66 | 29.83,45.77 29.83,44.81 C25.+ | 37.6,46.02 37.35,45.77 29.83,45.77 | v37.48,66.45 37.48,66.64 37.17,66.95 37.17,67.55 U5.12 U5.13
  Bottom 0.152: v33.33,58.64 33.33,59.67 33.31,59.69 33.31,60.38 34.11,61.18 34.11,62.32 34.8,63.01 38.97,63.01 39.27,63.31 39.27,65.84 39.07,66.04 37.89,66.04 v37.48,66.45
N$78
  Top 0.152: U5.16 40,67.87 40.51,68.38 40.51,76.77 JP1.2
N$79
  Top 0.152: U5.1 39.45,76.95 JP1.3
N$80
  Top 0.152: U5.2 38.8,75.25 38.25,75.79 36.7,75.79 36.26,76.23 JP1.4
N$81  (via drill 0.35)
  Top 0.152: JP1.5 33.72,75.28 v33.62,75.18 | v33.64,70.95 34.12,70.47 37.7,70.47 38.15,70.03 U5.14
  Bottom 0.152: v33.62,75.18 33.62,70.97 v33.64,70.95
N$82  (via drill 0.35)
  Top 0.152: 41.72,46.79 38.67,46.79 C18.2 | 41.72,46.79 43.39,45.11 C26.+ | U6.6 44.76,57.61 44.76,56.84 U6.5 44.61,56.69 43.85,56.69 v43.54,56.39 | v40.34,63.09 39.73,63.09 U4.9 39.59,65.11 38.9,65.81 34.96,65.81 34.38,66.39 34.38,67.35 U5.9 | v43.54,53.8 38.67,53.8 C16.2 | 41.72,46.79 41.72,49.68 42.63,50.6 C23.+
  Bottom 0.152: C23.+ 42.78,50.75 43.54,51.51 v43.54,53.8 v43.54,56.39 43.54,58.64 41,61.18 41,62.43 v40.34,63.09
N$83  (via drill 0.35)
  other vias: 36.49,64.43
N$84  (via drill 0.35)
  other vias: 37.43,64.43
N$85  (via drill 0.35)
  other vias: 38.35,64.44

## Text on the board
tNames: GND | DR | CS | SCK | MO | MI | SPI | PWR | nFLT | pH Probe | VM | GND | GND | IN1 | ...... | CH11 | CH12 | TC1 | CH13 | GND | SLP | VM | Driver1 | RST | PWR_3V3 | Sense_Unit | PWR | RST | RST | PWR | VM | VM | GND | GND | SLP | GND | IN1 | ...... | CH21 | CH31 | CH22 | CH32 | ...... | IN1 | CH23 | CH33 | SLP | GND | Driver2 | Driver3 | nFLT | nFLT
bNames: 3 CH Motor Driver + pH Sensing Unit / V1.0